# EAGLE board frets-input2 (EAGLE 6.6.0)
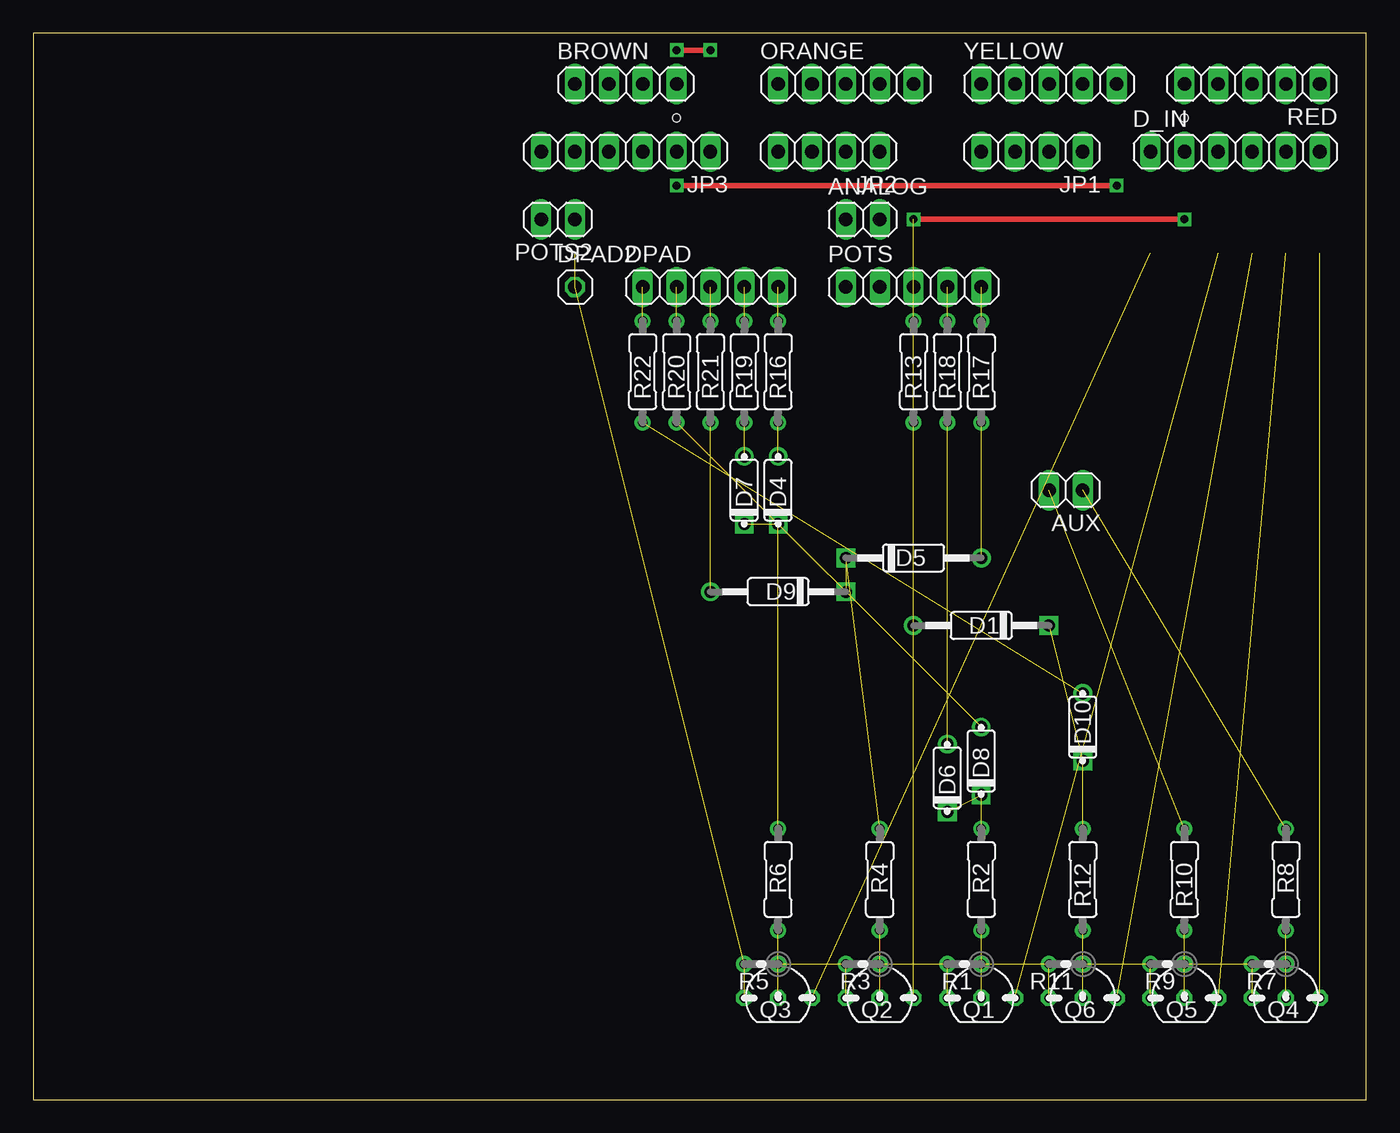
[diagram p0: board, top side]
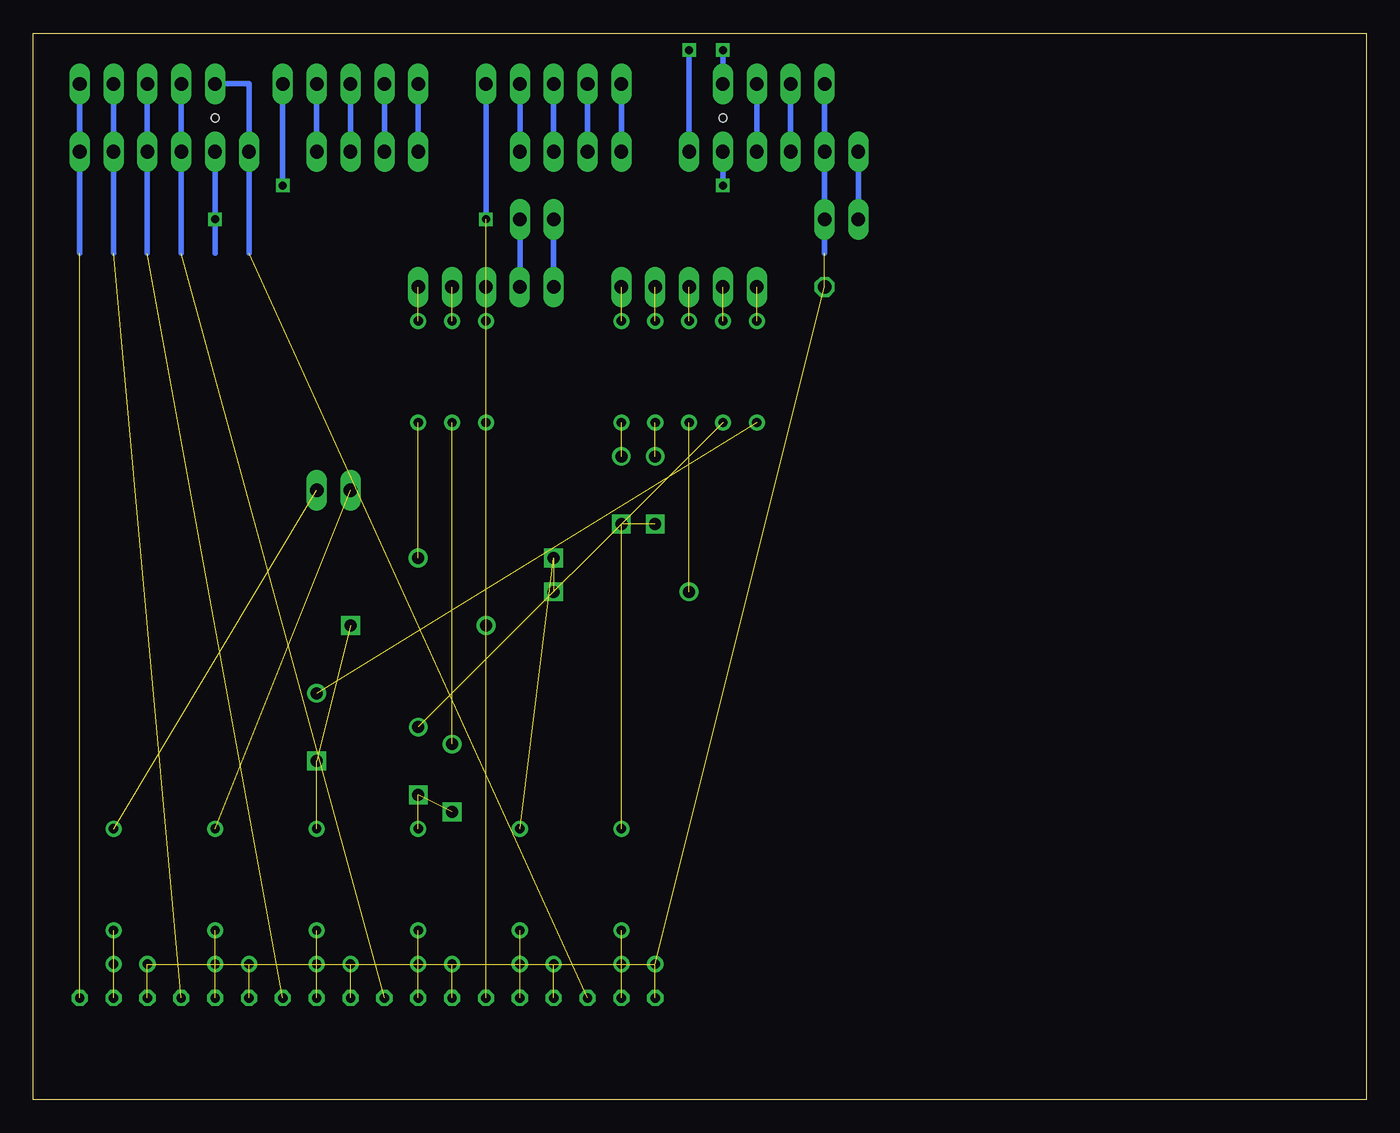
[diagram p1: board, bottom side, seen from below]

Size 100 x 80 mm. Coordinates in mm from the lower left corner, seen from the top.
Outline: 0,0 100,0 100,80 0,80 0,0
Copper layers (1*16): Top 0.035mm / dielectric 1.5mm / Bottom 0.035mm
Design rules "default": minimum track width 10mil, minimum drill 24mil, track to track 8mil, track to pad 8mil, pad to pad 8mil, via to via 8mil, smd to smd 8mil, copper to edge 40mil, drill to drill 8mil, minimum pad ring 10mil, minimum via ring 8mil, stop-mask expansion 4mil, vias tented up to drill 0mil, thermal gap 10mil
Holes 0.6 mm at 48.26,73.66 86.36,73.66

## Footprints (pad centres in the part's own frame; a part is rotated, then mirrored left to right if it is on the bottom)
1X02 = drill 1.016 long: 1 -1.27,0; 2 1.27,0
1X04 = drill 1.016 long: 1 -3.81,0; 2 -1.27,0; 3 1.27,0; 4 3.81,0
DO35-4 = drill 0.9 pad 1.422: A 5.08,0 | drill 0.9 pad 1.422 square: C -5.08,0
DO35-2 = drill 0.9: A 2.54,0 | drill 0.9 square: C -2.54,0
1X06 = drill 1.016 long: 1 -6.35,0; 2 -3.81,0; 3 -1.27,0; 4 1.27,0; 5 3.81,0; 6 6.35,0
1X05 = drill 1.016 long: 1 -5.08,0; 2 -2.54,0; 3 0,0; 4 2.54,0; 5 5.08,0
1X01 = drill 1.016 octagon: 1 0,0
TO92- = drill 0.7 octagon: 1 2.54,0; 2 0,0; 3 -2.54,0
R0207/1V = drill 0.7: 1 -1.27,0; 2 1.27,0
R0207/3 = drill 0.7: 1 -3.81,0; 2 3.81,0

## Placement (x,y rotation side)
ANALOG  [1X02]  62.23,66.04 0 top
AUX  [1X02]  77.47,45.72 180 top
BROWN  [1X04]  44.45,76.2 0 top
D1  1N4148-4  [DO35-4]  71.12,35.56 180 top
D4  1N4148-2  [DO35-2]  55.88,45.72 90 top
D5  1N4148-4  [DO35-4]  66.04,40.64 0 top
D6  1N4148-2  [DO35-2]  68.58,24.13 90 top
D7  1N4148-2  [DO35-2]  53.34,45.72 90 top
D8  1N4148-2  [DO35-2]  71.12,25.4 90 top
D9  1N4148-4  [DO35-4]  55.88,38.1 180 top
D10  1N4148-2  [DO35-2]  78.74,27.94 90 top
D_IN  [1X06]  90.17,71.12 0 top
DPAD  [1X05]  50.8,60.96 0 top
DPAD2  [1X01]  40.64,60.96 0 top
JP1  [1X04]  74.93,71.12 180 top
JP2  [1X04]  59.69,71.12 180 top
JP3  [1X06]  44.45,71.12 180 top
ORANGE  [1X05]  60.96,76.2 0 top
POTS  [1X05]  66.04,60.96 0 top
POTS2  [1X02]  39.37,66.04 180 top
Q1  2N5089  [TO92-]  71.12,7.62 0 top
Q2  2N5089  [TO92-]  63.5,7.62 0 top
Q3  2N5089  [TO92-]  55.88,7.62 0 top
Q4  2N5089  [TO92-]  93.98,7.62 0 top
Q5  2N5089  [TO92-]  86.36,7.62 0 top
Q6  2N5089  [TO92-]  78.74,7.62 0 top
R1  300k  [R0207/1V]  69.85,10.16 180 top
R2  1k  [R0207/3]  71.12,16.51 270 top
R3  300k  [R0207/1V]  62.23,10.16 180 top
R4  1k  [R0207/3]  63.5,16.51 270 top
R5  300k  [R0207/1V]  54.61,10.16 180 top
R6  1k  [R0207/3]  55.88,16.51 270 top
R7  300k  [R0207/1V]  92.71,10.16 180 top
R8  1k  [R0207/3]  93.98,16.51 270 top
R9  300k  [R0207/1V]  85.09,10.16 180 top
R10  1k  [R0207/3]  86.36,16.51 270 top
R11  300k  [R0207/1V]  77.47,10.16 180 top
R12  1k  [R0207/3]  78.74,16.51 270 top
R13  30k  [R0207/3]  66.04,54.61 270 top
R16  30k  [R0207/3]  55.88,54.61 270 top
R17  30k  [R0207/3]  71.12,54.61 270 top
R18  30k  [R0207/3]  68.58,54.61 270 top
R19  30k  [R0207/3]  53.34,54.61 270 top
R20  30k  [R0207/3]  48.26,54.61 270 top
R21  30k  [R0207/3]  50.8,54.61 270 top
R22  30k  [R0207/3]  45.72,54.61 270 top
RED  [1X05]  91.44,76.2 180 top
YELLOW  [1X05]  76.2,76.2 0 top

## Library data of the parts
ANALOG AUX BROWN D_IN DPAD DPAD2 JP1-JP3 ORANGE POTS POTS2 RED YELLOW = pinhead
D1 D4-D10 = gm-diodes
Q1-Q6 = gm-trans
R1-R13 R16-R22 = gm-resistors

## Nets
BACK: POTS.4 R18.1
D0: D_IN.1 Q3.1 RED.5
D1: D_IN.2 ORANGE.5 Q2.1
D2: D_IN.3 Q1.1 RED.4
D3: D_IN.4 Q6.1 RED.3
D4: D_IN.5 Q5.1 RED.2
D5: D_IN.6 Q4.1 RED.1
D_DOWN: DPAD.1 R22.1
D_LEFT: DPAD.2 R20.1
D_RIGHT: DPAD.3 R21.1
D_UP: DPAD.4 R19.1
GND: BROWN.1 DPAD2.1 JP3.5 POTS2.1 Q1.3 Q2.3 Q3.3 Q4.3 Q5.3 Q6.3 R1.2 R3.2 R5.2 R7.2 R9.2 R11.2
M_F1: JP1.1 YELLOW.4
M_F2: JP1.2 YELLOW.3
M_F3: JP1.3 YELLOW.2
M_F4: JP1.4 YELLOW.1
M_F5: JP2.1 ORANGE.4
M_F6: JP2.2 ORANGE.3
M_F7: JP2.3 ORANGE.2
M_F8: JP2.4 ORANGE.1
M_F9: BROWN.4 JP3.1
M_F10: JP3.2 YELLOW.5
M_F11: BROWN.3 JP3.3
M_F12: BROWN.2 JP3.4
N$2: Q2.2 R3.1 R4.2
N$3: AUX.2 R10.1
N$4: D5.C D9.C R4.1
N$5: Q3.2 R5.1 R6.2
N$6: Q1.2 R1.1 R2.2
N$7: D6.C D8.C R2.1
N$8: D4.A R16.2
N$9: D5.A R17.2
N$10: D4.C D7.C R6.1
N$11: Q4.2 R7.1 R8.2
N$12: D6.A R18.2
N$13: AUX.1 R8.1
N$14: Q5.2 R9.1 R10.2
N$15: D1.A R13.2
N$18: Q6.2 R11.1 R12.2
N$20: D1.C D10.C R12.1
N$21: D7.A R19.2
N$22: D8.A R20.2
N$23: D9.A R21.2
N$24: D10.A R22.2
ORNG: JP3.6 POTS2.2
POT_A: ANALOG.2 POTS.2
POT_B: ANALOG.1 POTS.1
SIDE_B: POTS.5 R17.1
START: POTS.3 R13.1
X_BUTTON: DPAD.5 R16.1

## Tracks (layer width: path | path; a pad name or v marks a point on that pad's centre or on a via)
BACK  (1 unrouted)
D0  (1 unrouted)
  Bottom 0.406: RED.5 83.82,76.2 D_IN.1 83.82,63.5
D1  (via drill 0.6)  (1 unrouted)
  Top 0.406: v86.36,66.04 v66.04,66.04
  Bottom 0.406: v66.04,66.04 ORANGE.5 | D_IN.2 v86.36,66.04 86.36,63.5
D2  (1 unrouted)
  Bottom 0.406: RED.4 D_IN.3 88.9,63.5
D3  (1 unrouted)
  Bottom 0.406: RED.3 D_IN.4 91.44,63.5
D4  (1 unrouted)
  Bottom 0.406: RED.2 D_IN.5 93.98,63.5
D5  (1 unrouted)
  Bottom 0.406: RED.1 D_IN.6 96.52,63.5
D_DOWN  (1 unrouted)
D_LEFT  (1 unrouted)
D_RIGHT  (1 unrouted)
D_UP  (1 unrouted)
GND  (13 unrouted)
  Bottom 0.406: BROWN.1 JP3.5 POTS2.1 40.64,63.5
M_F1
  Bottom 0.406: YELLOW.4 JP1.1
M_F2
  Bottom 0.406: JP1.2 YELLOW.3
M_F3
  Bottom 0.406: YELLOW.2 JP1.3
M_F4
  Bottom 0.406: JP1.4 YELLOW.1
M_F5
  Bottom 0.406: ORANGE.4 JP2.1
M_F6
  Bottom 0.406: JP2.2 ORANGE.3
M_F7
  Bottom 0.406: ORANGE.2 JP2.3
M_F8
  Bottom 0.406: JP2.4 ORANGE.1
M_F9  (via drill 0.6)
  Top 0.406: v48.26,78.74 v50.8,78.74
  Bottom 0.406: BROWN.4 v48.26,78.74 | v50.8,78.74 JP3.1
M_F10  (via drill 0.6)
  Top 0.406: v48.26,68.58 v81.28,68.58
  Bottom 0.406: JP3.2 v48.26,68.58 | v81.28,68.58 YELLOW.5
M_F11
  Bottom 0.406: BROWN.3 JP3.3
M_F12
  Bottom 0.406: BROWN.2 JP3.4
N$2  (2 unrouted)
N$3  (1 unrouted)
N$4  (2 unrouted)
N$5  (2 unrouted)
N$6  (2 unrouted)
N$7  (2 unrouted)
N$8  (1 unrouted)
N$9  (1 unrouted)
N$10  (2 unrouted)
N$11  (2 unrouted)
N$12  (1 unrouted)
N$13  (1 unrouted)
N$14  (2 unrouted)
N$15  (1 unrouted)
N$18  (2 unrouted)
N$20  (2 unrouted)
N$21  (1 unrouted)
N$22  (1 unrouted)
N$23  (1 unrouted)
N$24  (1 unrouted)
ORNG
  Bottom 0.406: JP3.6 POTS2.2
POT_A
  Bottom 0.406: ANALOG.2 POTS.2
POT_B
  Bottom 0.406: ANALOG.1 POTS.1
SIDE_B  (1 unrouted)
START  (1 unrouted)
X_BUTTON  (1 unrouted)